# EAGLE board demo (EAGLE 5.11)
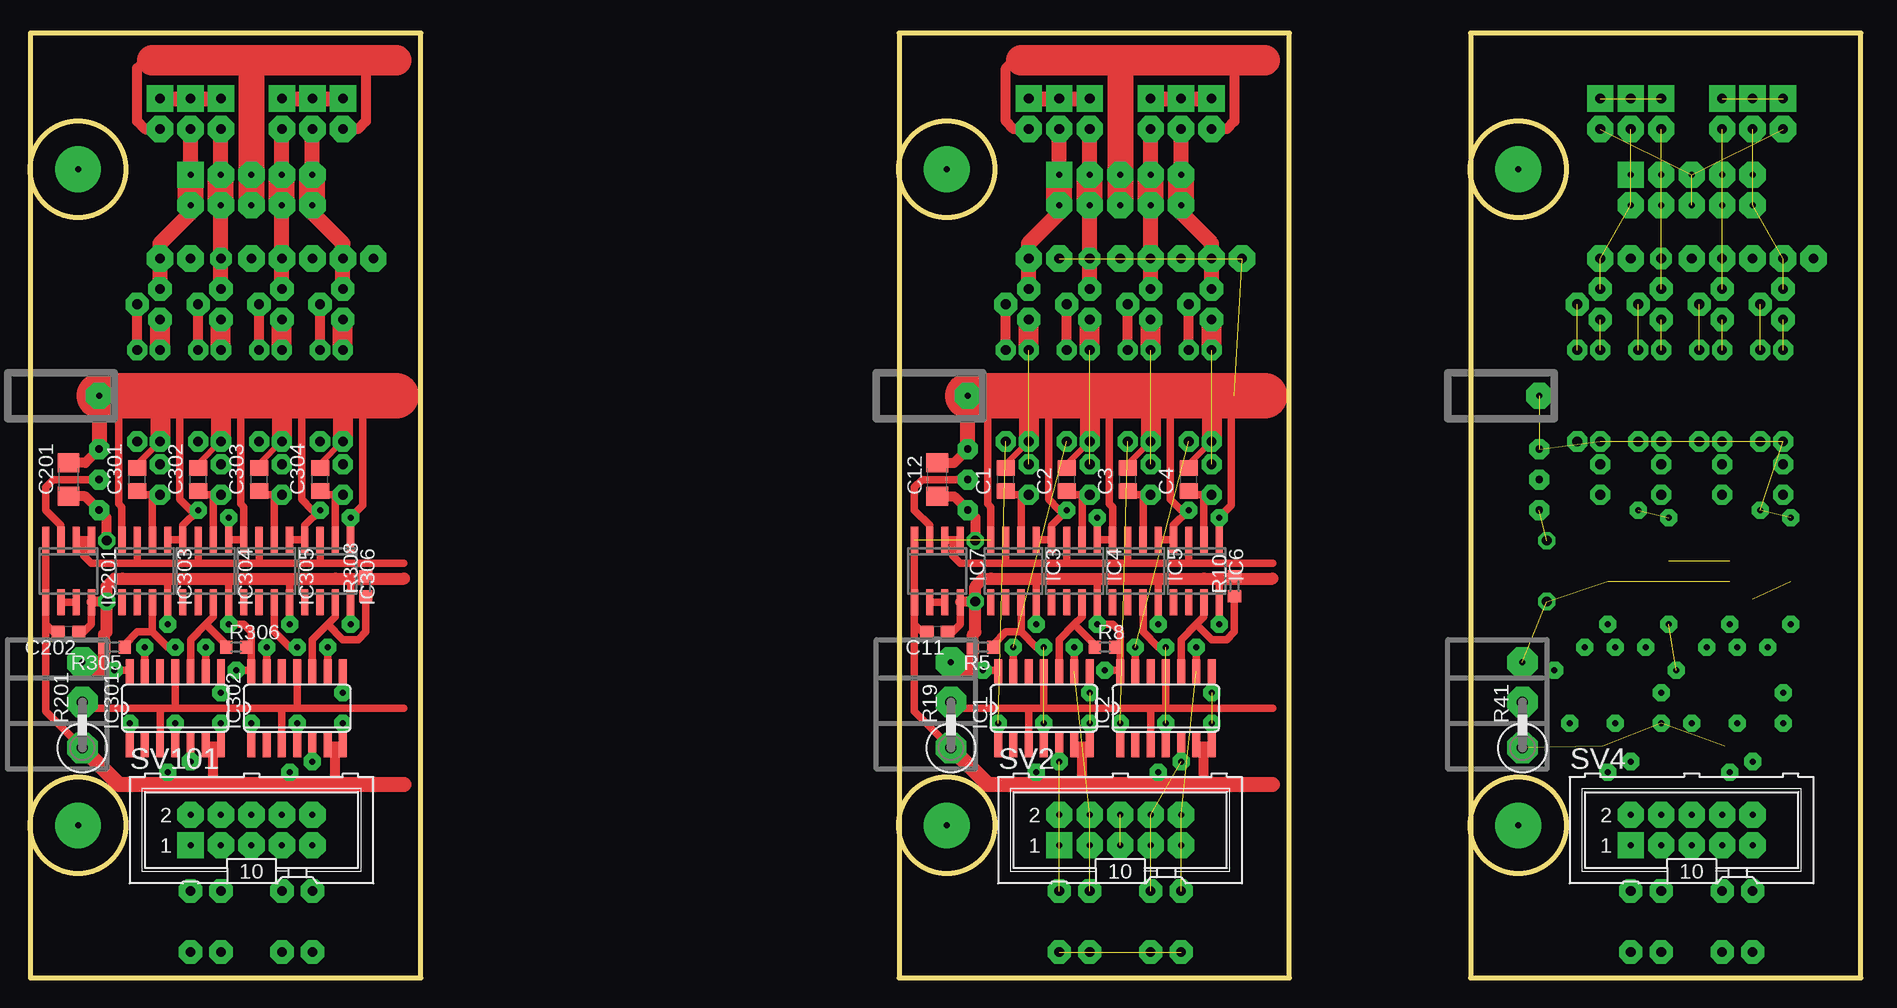
[diagram p0: board, top side]
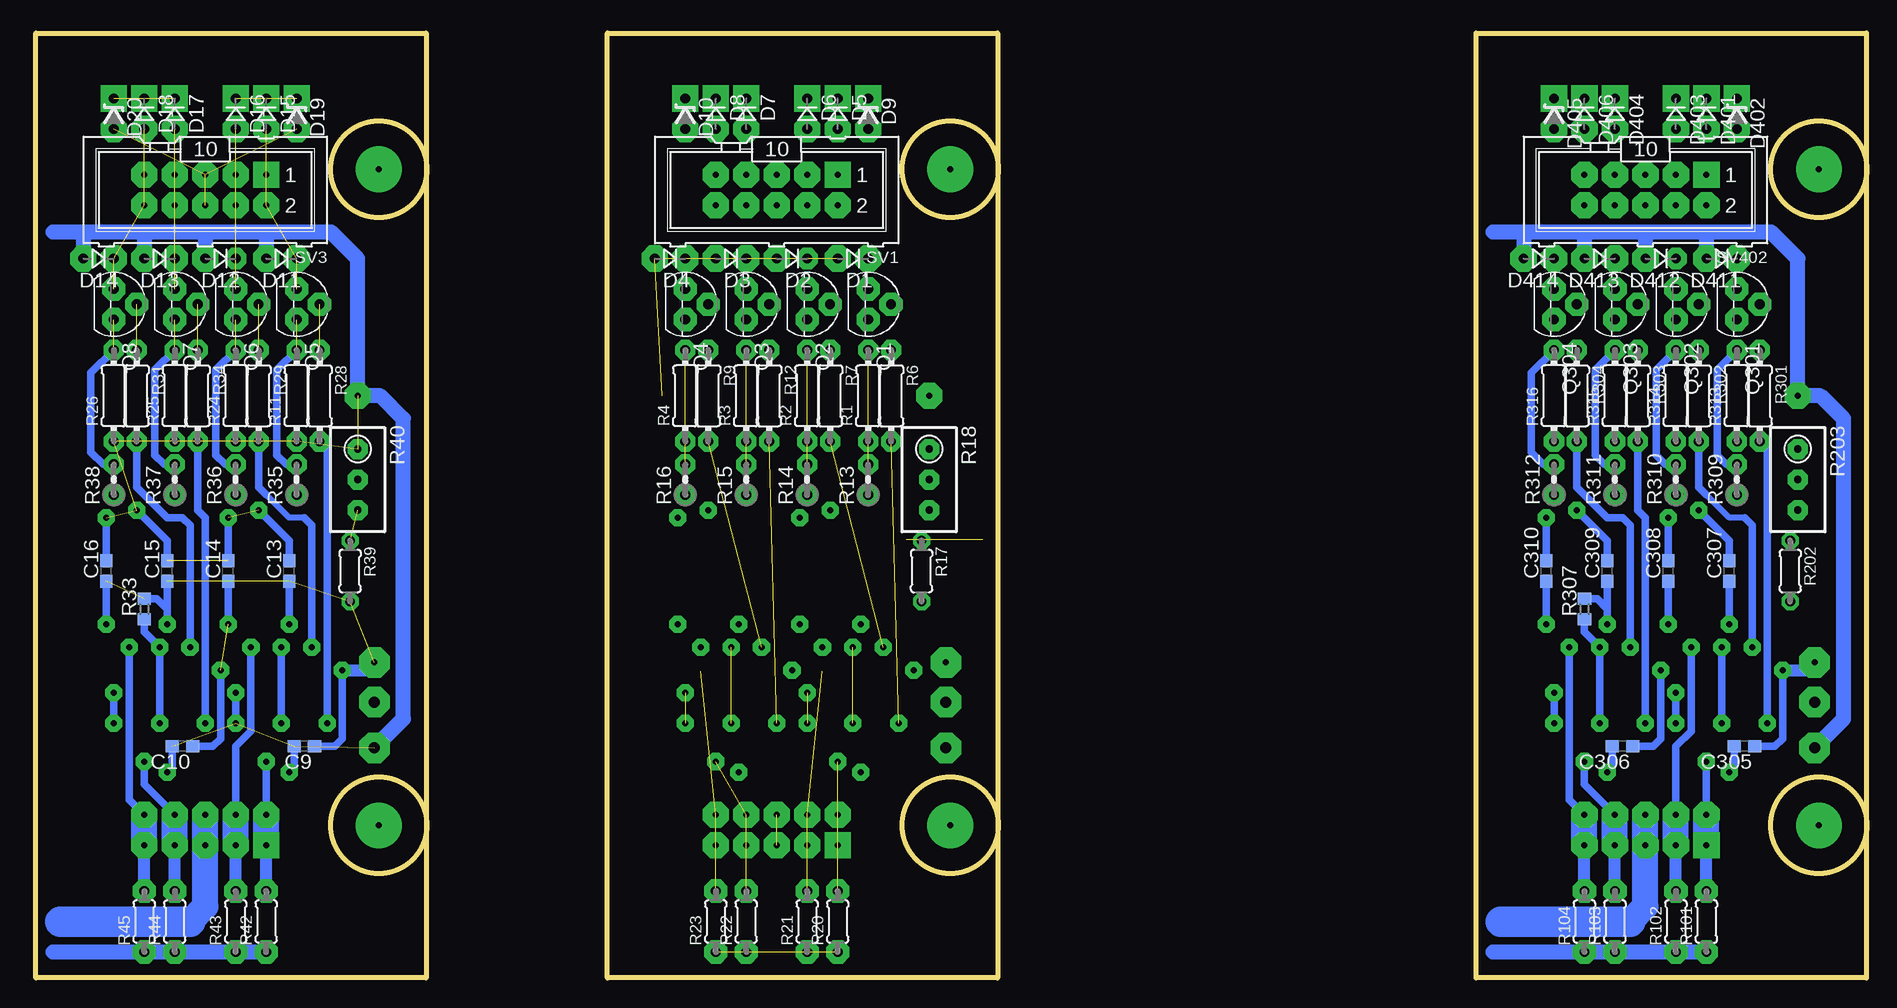
[diagram p1: board, bottom side, seen from below]

Size 152.58 x 78.74 mm. Coordinates in mm from the lower left corner, seen from the top.
Outline: 0.04,0 32.56,0 32.56,78.74 0.04,78.74 0.04,0
Outline: 72.43,0 104.96,0 104.96,78.74 72.43,78.74 72.43,0
Outline: 120.06,0 152.58,0 152.58,78.74 120.06,78.74 120.06,0
Outline: circle at 4,12.71 radius 4
Outline: circle at 4,67.39 radius 4
Outline: circle at 76.39,12.71 radius 4
Outline: circle at 76.39,67.39 radius 4
Outline: circle at 124.02,12.71 radius 4
Outline: circle at 124.02,67.39 radius 4
Copper layers (1*16): Top 0.035mm / dielectric 1.5mm / Bottom 0.035mm
Design rules "default *": minimum track width 10mil, minimum drill 19mil, track to track 8mil, track to pad 8mil, pad to pad 8mil, via to via 8mil, smd to smd 8mil, copper to edge 40mil, drill to drill 8mil, minimum pad ring 10mil, minimum via ring 8mil, stop-mask expansion 4mil, vias tented up to drill 0mil, thermal gap 10mil

## Footprints (pad centres in the part's own frame; a part is rotated, then mirrored left to right if it is on the bottom)
C0805 = smd 1.3 x 1.5: 1 -0.95,0; 2 0.95,0
C0603 = smd 1.1 x 1: 1 -0.85,0; 2 0.85,0
C1206 = smd 1.6 x 1.8: 1 -1.4,0; 2 1.4,0
D-2.5 = drill 0.813 octagon: A 1.27,0; C -1.27,0
ZDIO-2.5 = drill 0.813 octagon: A 1.27,0; C -1.27,0
SO14 = smd 0.66 x 2.032: 1 -3.81,-3.073; 2 -2.54,-3.073; 3 -1.27,-3.073; 4 0,-3.073; 5 1.27,-3.073; 6 2.54,-3.073; 7 3.81,-3.073; 8 3.81,3.073; 9 2.54,3.073; 10 1.27,3.073; 11 0,3.073; 12 -1.27,3.073; 13 -2.54,3.073; 14 -3.81,3.073
SO08 = smd 0.6 x 2.2: 1 -1.905,-2.6; 2 -0.635,-2.6; 3 0.635,-2.6; 4 1.905,-2.6; 5 1.905,2.6; 6 0.635,2.6; 7 -0.635,2.6; 8 -1.905,2.6
TO92 = drill 0.813 octagon: 1 1.27,0; 2 0,1.905; 3 -1.27,0
0204/7 = drill 0.813 octagon: 1 -3.81,0; 2 3.81,0
R0603 = smd 1 x 1.1: 1 -0.85,0; 2 0.85,0
0204V = drill 0.813 octagon: 1 -1.27,0; 2 1.27,0
0204/5 = drill 0.813 octagon: 1 -2.54,0; 2 2.54,0
RTRIM3296W = drill 0.61 round: 1 0,-2.54; 2 0,0; 3 0,2.54
0411V = drill 0.914 octagon: 1 -2.54,0; 2 1.27,0
M10-HOME = drill 0.5 pad 2.184 square: 1 -5.08,-1.27 | drill 0.5 pad 2.184 octagon: 2 -5.08,1.27; 3 -2.54,-1.27; 4 -2.54,1.27; 5 0,-1.27; 6 0,1.27; 7 2.54,-1.27; 8 2.54,1.27; 9 5.08,-1.27; 10 5.08,1.27

## Placement (x,y rotation side)
C1  100nF  [C0805]  81.32,41.53 90 top
C2  100nF  [C0805]  86.4,41.53 90 top
C3  100nF  [C0805]  91.48,41.53 90 top
C4  100nF  [C0805]  96.56,41.53 90 top
C9  100nF  [C0603]  130.22,19.3 180 bottom
C10  100nF  [C0603]  140.38,19.3 180 bottom
C11  100nF  [C0603]  75.61,28.83 180 top
C12  100nF  [C1206]  75.61,41.53 90 top
C13  100nF  [C0603]  131.48,33.91 90 bottom
C14  100nF  [C0603]  136.56,33.91 90 bottom
C15  100nF  [C0603]  141.64,33.91 90 bottom
C16  100nF  [C0603]  146.72,33.91 90 bottom
C201  100nF  [C1206]  3.21,41.53 90 top
C202  100nF  [C0603]  3.21,28.83 180 top
C301  100nF  [C0805]  8.93,41.53 90 top
C302  100nF  [C0805]  14.01,41.53 90 top
C303  100nF  [C0805]  19.09,41.53 90 top
C304  100nF  [C0805]  24.17,41.53 90 top
C305  100nF  [C0603]  10.2,19.3 180 bottom
C306  100nF  [C0603]  20.36,19.3 180 bottom
C307  100nF  [C0603]  11.47,33.91 90 bottom
C308  100nF  [C0603]  16.55,33.91 90 bottom
C309  100nF  [C0603]  21.63,33.91 90 bottom
C310  100nF  [C0603]  26.71,33.91 90 bottom
D1  [D-2.5]  84.5,59.94 180 bottom
D2  [D-2.5]  89.58,59.94 180 bottom
D3  [D-2.5]  94.66,59.94 180 bottom
D4  [D-2.5]  99.73,59.94 180 bottom
D5  [D-2.5]  85.77,72.01 270 bottom
D6  [D-2.5]  88.31,72.01 270 bottom
D7  [D-2.5]  93.39,72.01 270 bottom
D8  [D-2.5]  95.93,72.01 270 bottom
D9  [ZDIO-2.5]  83.23,72.01 270 bottom
D10  [ZDIO-2.5]  98.47,72.01 270 bottom
D11  [D-2.5]  132.12,59.94 180 bottom
D12  [D-2.5]  137.2,59.94 180 bottom
D13  [D-2.5]  142.28,59.94 180 bottom
D14  [D-2.5]  147.36,59.94 180 bottom
D15  [D-2.5]  133.39,72.01 270 bottom
D16  [D-2.5]  135.93,72.01 270 bottom
D17  [D-2.5]  141.01,72.01 270 bottom
D18  [D-2.5]  143.55,72.01 270 bottom
D19  [ZDIO-2.5]  130.85,72.01 270 bottom
D20  [ZDIO-2.5]  146.09,72.01 270 bottom
D401  [D-2.5]  13.38,72.01 270 bottom
D402  [ZDIO-2.5]  10.84,72.01 270 bottom
D403  [D-2.5]  15.91,72.01 270 bottom
D404  [D-2.5]  20.99,72.01 270 bottom
D405  [ZDIO-2.5]  26.07,72.01 270 bottom
D406  [D-2.5]  23.54,72.01 270 bottom
D411  [D-2.5]  12.11,59.94 180 bottom
D412  [D-2.5]  17.18,59.94 180 bottom
D413  [D-2.5]  22.27,59.94 180 bottom
D414  [D-2.5]  27.34,59.94 180 bottom
IC1  4013D  [SO14]  84.5,22.48 0 top
IC2  4013D  [SO14]  94.66,22.48 0 top
IC3  LM311D  [SO08]  81.96,33.91 180 top
IC4  LM311D  [SO08]  87.04,33.91 180 top
IC5  LM311D  [SO08]  92.12,33.91 180 top
IC6  LM311D  [SO08]  97.2,33.91 180 top
IC7  LM358D  [SO08]  75.61,33.91 180 top
IC201  LM358D  [SO08]  3.21,33.91 180 top
IC301  4013D  [SO14]  12.11,22.48 0 top
IC302  4013D  [SO14]  22.27,22.48 0 top
IC303  LM311D  [SO08]  9.57,33.91 180 top
IC304  LM311D  [SO08]  14.64,33.91 180 top
IC305  LM311D  [SO08]  19.72,33.91 180 top
IC306  LM311D  [SO08]  24.8,33.91 180 top
Q1  BC547  [TO92]  83.23,56.13 270 bottom
Q2  BC547  [TO92]  88.31,56.13 270 bottom
Q3  BC547  [TO92]  93.39,56.13 270 bottom
Q4  BC547  [TO92]  98.47,56.13 270 bottom
Q5  BC547  [TO92]  130.85,56.13 270 bottom
Q6  BC547  [TO92]  135.93,56.13 270 bottom
Q7  BC547  [TO92]  141.01,56.13 270 bottom
Q8  BC547  [TO92]  146.09,56.13 270 bottom
Q301  BC547  [TO92]  10.84,56.13 270 bottom
Q302  BC547  [TO92]  15.91,56.13 270 bottom
Q303  BC547  [TO92]  20.99,56.13 270 bottom
Q304  BC547  [TO92]  26.07,56.13 270 bottom
R1  1R0  [0204/7]  83.23,48.51 90 bottom
R2  1R0  [0204/7]  88.31,48.51 90 bottom
R3  1R0  [0204/7]  93.39,48.51 90 bottom
R4  1R0  [0204/7]  98.47,48.51 90 bottom
R5  1K  [R0603]  79.42,27.56 180 top
R6  1K  [0204/7]  81.32,48.51 270 bottom
R7  1K  [0204/7]  86.4,48.51 270 bottom
R8  1K  [R0603]  89.58,27.56 0 top
R9  1K  [0204/7]  96.56,48.51 270 bottom
R10  1K  [R0603]  100.37,32.64 90 top
R11  1R0  [0204/7]  130.85,48.51 90 bottom
R12  1K  [0204/7]  91.48,48.51 270 bottom
R13  1K  [0204V]  83.23,41.53 90 bottom
R14  1K  [0204V]  88.31,41.53 90 bottom
R15  1K  [0204V]  93.39,41.53 90 bottom
R16  1K  [0204V]  98.47,41.53 90 bottom
R17  2K  [0204/5]  78.78,33.91 270 bottom
R18  2K  [RTRIM3296W]  78.15,41.53 180 bottom
R19  1K  [0411V]  76.75,21.72 90 top
R20  [0204/5]  85.77,4.7 90 bottom
R21  [0204/5]  88.31,4.7 90 bottom
R22  [0204/5]  93.39,4.7 90 bottom
R23  [0204/5]  95.93,4.7 90 bottom
R24  1R0  [0204/7]  135.93,48.51 90 bottom
R25  1R0  [0204/7]  141.01,48.51 90 bottom
R26  1R0  [0204/7]  146.09,48.51 90 bottom
R28  1K  [0204/7]  128.94,48.51 270 bottom
R29  1K  [0204/7]  134.03,48.51 270 bottom
R31  1K  [0204/7]  144.19,48.51 270 bottom
R33  1K  [R0603]  143.55,30.73 90 bottom
R34  1K  [0204/7]  139.1,48.51 270 bottom
R35  1K  [0204V]  130.85,41.53 90 bottom
R36  1K  [0204V]  135.93,41.53 90 bottom
R37  1K  [0204V]  141.01,41.53 90 bottom
R38  1K  [0204V]  146.09,41.53 90 bottom
R39  2K  [0204/5]  126.41,33.91 270 bottom
R40  2K  [RTRIM3296W]  125.77,41.53 180 bottom
R41  1K  [0411V]  124.37,21.72 90 top
R42  [0204/5]  133.39,4.7 90 bottom
R43  [0204/5]  135.93,4.7 90 bottom
R44  [0204/5]  141.01,4.7 90 bottom
R45  [0204/5]  143.55,4.7 90 bottom
R101  [0204/5]  13.38,4.7 90 bottom
R102  [0204/5]  15.91,4.7 90 bottom
R103  [0204/5]  20.99,4.7 90 bottom
R104  [0204/5]  23.54,4.7 90 bottom
R201  1K  [0411V]  4.36,21.72 90 top
R202  2K  [0204/5]  6.39,33.91 270 bottom
R203  2K  [RTRIM3296W]  5.75,41.53 180 bottom
R301  1K  [0204/7]  8.93,48.51 270 bottom
R302  1K  [0204/7]  14.01,48.51 270 bottom
R303  1K  [0204/7]  19.09,48.51 270 bottom
R304  1K  [0204/7]  24.17,48.51 270 bottom
R305  1K  [R0603]  7.03,27.56 180 top
R306  1K  [R0603]  17.18,27.56 0 top
R307  1K  [R0603]  23.54,30.73 90 bottom
R308  1K  [R0603]  27.98,32.64 90 top
R309  1K  [0204V]  10.84,41.53 90 bottom
R310  1K  [0204V]  15.91,41.53 90 bottom
R311  1K  [0204V]  20.99,41.53 90 bottom
R312  1K  [0204V]  26.07,41.53 90 bottom
R313  1R0  [0204/7]  10.84,48.51 90 bottom
R314  1R0  [0204/7]  15.91,48.51 90 bottom
R315  1R0  [0204/7]  20.99,48.51 90 bottom
R316  1R0  [0204/7]  26.07,48.51 90 bottom
SV1  BH10S  [M10-HOME]  90.85,65.66 180 bottom
SV2  BH10S  [M10-HOME]  90.85,12.32 0 top
SV3  BH10S  [M10-HOME]  138.47,65.66 180 bottom
SV4  BH10S  [M10-HOME]  138.47,12.32 0 top
SV101  BH10S  [M10-HOME]  18.45,12.32 0 top
SV402  BH10S  [M10-HOME]  18.45,65.66 180 bottom

## Library data of the parts
C1-C4 C9-C16 C201 C202 C301-C310 R1-R26 R28 R29 R31 R33-R45 R101-R104 R201-R203 R301-R316 = rcl
D1-D20 D401-D406 D411-D414 = diode
IC1 IC2 IC301 IC302 = 40xx
IC3-IC7 IC201 IC303-IC306 = linear
Q1-Q8 Q301-Q304 = transistor-npn
SV1-SV4 SV101 SV402 = con-harting-ml

## Nets
+5V: C202.1 C305.1 C306.1 C307.1 C308.1 C309.1 C310.1 IC201.8 IC301.14 IC302.14 IC303.8 IC304.8 IC305.8 IC306.8 R202.2 R305.2 R306.2 R307.2 R308.2
+5V1: C11.1 IC1.14 IC2.14 IC3.8 IC4.8 IC5.8 IC6.8 IC7.8 R5.2 R8.2 R10.2 R17.2
+5V2: C9.1 C10.1 C13.1 C14.1 C15.1 C16.1 R33.2 R39.2
CMP_REF: IC201.1 IC201.2 IC303.3 IC304.3 IC305.3 IC306.3
CMP_REF1: IC3.3 IC4.3 IC5.3 IC6.3 IC7.1 IC7.2
FB1: Q1.1 R1.2 R13.2
FB2: Q2.1 R2.2 R14.2
FB3: Q3.1 R3.2 R15.2
FB4: Q4.1 R4.2 R16.2
FB5: Q5.1 R11.2 R35.2
FB6: Q6.1 R24.2 R36.2
FB7: Q7.1 R25.2 R37.2
FB8: Q8.1 R26.2 R38.2
FB11: Q301.1 R309.2 R313.2
FB12: Q302.1 R310.2 R314.2
FB13: Q303.1 R311.2 R315.2
FB14: Q304.1 R312.2 R316.2
GND: C201.2 C202.2 C301.2 C302.2 C303.2 C304.2 C305.2 C306.2 C307.2 C308.2 C309.2 C310.2 D411.A D412.A D413.A D414.A IC201.4 IC201.5 IC301.6 IC301.7 IC301.8 IC302.6 IC302.7 IC302.8 IC303.1 IC303.4 IC304.1 IC304.4 IC305.1 IC305.4 IC306.1 IC306.4 R201.1 R203.1 R313.1 R314.1 R315.1 R316.1
GND1: C1.2 C2.2 C3.2 C4.2 C11.2 C12.2 D1.A D2.A D3.A D4.A IC1.6 IC1.7 IC1.8 IC2.6 IC2.7 IC2.8 IC3.1 IC3.4 IC4.1 IC4.4 IC5.1 IC5.4 IC6.1 IC6.4 IC7.4 IC7.5 R1.1 R2.1 R3.1 R4.1 R18.1 R19.1
GND2: C9.2 C10.2 C13.2 C14.2 C15.2 C16.2 D11.A D12.A D13.A D14.A R11.1 R24.1 R25.1 R26.1 R40.1 R41.1
M1: D1.C D5.A Q1.3 SV1.1 SV1.2
M2: D2.C D6.A Q2.3 SV1.3 SV1.4
M3: D3.C D7.A Q3.3 SV1.7 SV1.8
M4: D4.C D8.A Q4.3 SV1.9 SV1.10
M5: D11.C D15.A Q5.3 SV3.1 SV3.2
M6: D12.C D16.A Q6.3 SV3.3 SV3.4
M7: D13.C D17.A Q7.3 SV3.7 SV3.8
M8: D14.C D18.A Q8.3 SV3.9 SV3.10
M11: D401.A D411.C Q301.3 SV402.1 SV402.2
M11_EN: IC301.5 R101.2 SV101.1 SV101.2
M11_EN1: IC1.5 R20.2 SV2.1 SV2.2
M11_EN2: R42.2 SV4.1 SV4.2
M12: D403.A D412.C Q302.3 SV402.3 SV402.4
M12_EN: IC301.9 R102.2 SV101.3 SV101.4
M12_EN1: IC1.9 R21.2 SV2.3 SV2.4
M12_EN2: R43.2 SV4.3 SV4.4
M13: D404.A D413.C Q303.3 SV402.7 SV402.8
M13_EN: IC302.5 R103.2 SV101.7 SV101.8
M13_EN1: IC2.5 R22.2 SV2.7 SV2.8
M13_EN2: R44.2 SV4.7 SV4.8
M14: D406.A D414.C Q304.3 SV402.9 SV402.10
M14_EN: IC302.9 R104.2 SV101.9 SV101.10
M14_EN1: IC2.9 R23.2 SV2.9 SV2.10
M14_EN2: R45.2 SV4.9 SV4.10
N$1: C201.1 R202.1 R203.3
N$2: D401.C D402.C D403.C
N$3: IC201.6 IC201.7
N$4: D404.C D405.C D406.C
N$5: IC301.10 IC304.7 R306.1
N$7: Q301.2 R301.1
N$8: IC301.13 R302.2
N$9: IC301.1 R301.2
N$10: IC301.4 IC303.7 R305.1
N$11: Q302.2 R302.1
N$12: Q304.2 R304.1
N$13: Q303.2 R303.1
N$14: IC302.13 R304.2
N$15: IC302.10 IC306.7 R308.1
N$16: IC302.1 R303.2
N$17: C304.1 IC306.2 R312.1
N$18: IC302.4 IC305.7 R307.1
N$19: C303.1 IC305.2 R311.1
N$20: C302.1 IC304.2 R310.1
N$22: C301.1 IC303.2 R309.1
N$24: Q1.2 R6.1
N$25: IC1.1 R6.2
N$26: IC1.4 IC3.7 R5.1
N$27: IC1.10 IC4.7 R8.1
N$28: IC1.13 R7.2
N$29: Q2.2 R7.1
N$30: Q4.2 R9.1
N$31: IC2.13 R9.2
N$32: IC2.10 IC6.7 R10.1
N$33: Q3.2 R12.1
N$34: IC2.1 R12.2
N$35: IC2.4 IC5.7
N$36: C4.1 IC6.2 R16.1
N$37: C3.1 IC5.2 R15.1
N$38: C2.1 IC4.2 R14.1
N$39: C1.1 IC3.2 R13.1
N$40: C12.1 R17.1 R18.3
N$41: IC7.6 IC7.7
N$42: D5.C D6.C D9.C
N$43: D7.C D8.C D10.C
N$46: Q5.2 R28.1
N$47: R28.2
N$51: R29.2
N$52: Q6.2 R29.1
N$53: Q8.2 R31.1
N$54: R31.2
N$56: Q7.2 R34.1
N$57: R34.2
N$58: R33.1
N$59: R38.1
N$60: R37.1
N$61: R36.1
N$62: R35.1
N$63: R39.1 R40.3
N$65: D15.C D16.C D19.C
N$66: D17.C D18.C D20.C
S$1: D9.A D10.A SV1.5 SV1.6
S$2: D402.A D405.A SV402.5 SV402.6
S$3: R20.1 R21.1 R22.1 R23.1
S$4: D19.A D20.A SV3.5 SV3.6
S$5: R42.1 R43.1 R44.1 R45.1
S$24: R101.1 R102.1 R103.1 R104.1
TR_CLK: IC301.3 IC301.11 IC302.3 IC302.11 R201.2
TR_CLK1: IC1.3 IC1.11 IC2.3 IC2.11 R19.2
TR_CLK2: R41.2
VCC: SV101.5 SV101.6
VCC1: SV2.5 SV2.6
VCC2: SV4.5 SV4.6
~0.5V: IC201.3 R203.2
~0.5V1: IC7.3 R18.2
~0.5V2: R40.2

## Tracks (layer width: path | path; a pad name or v marks a point on that pad's centre or on a via)
+5V  (via drill 0.5 pad 1.42, 0.5 pad 2.54)
  Top 0.61: 11.47,33.27 16.55,33.27 | 21.63,33.27 16.55,33.27 | 25.44,33.27 21.63,33.27 | 21.63,33.27 IC305.8 v21.63,29.46 | 18.45,27.56 IC302.14 18.35,25.65 v17.18,25.65 | 18.45,27.56 18.45,28.83 17.82,29.46 v16.55,29.46 IC304.8 16.55,33.27 | 11.47,33.27 IC303.8 v11.47,29.46 | v26.71,29.46 IC306.8 C310.1 26.71,33.27 27.56,33.49 R308.2 | 18.45,27.56 R306.2 | v7.03,25.65 8.19,25.65 IC301.14 | C202.1 4.49,28.83 5.12,29.46 IC201.8 | 7.71,33.27 11.47,33.27
  Top 0.813: v6.39,31.37 5.18,31.37 IC201.8
  Top 1.016: 31.15,33.27 26.71,33.27 25.44,33.27 7.71,33.27 7.03,33.27 6.39,32.64 v6.39,31.37 6.39,28.83 6.17,28.61 R305.2 6.17,25.87 6.39,25.65 | v7.03,25.65 6.39,25.65 | 6.39,25.65 4.99,25.65 v4.36,26.29
  Bottom 0.61: v11.47,29.46 C307.1 | v16.55,29.46 C308.1 | C309.1 v21.63,29.46 21.63,30.73 22.48,31.58 R307.2 | v26.71,29.46 C310.1 | C306.1 17.82,19.3 17.18,19.94 v17.18,25.65 | C305.1 7.66,19.3 7.03,19.94 v7.03,25.65
  Bottom 1.016: v7.03,25.65 4.99,25.65 v4.36,26.29
+5V1  (via drill 0.5 pad 1.42, 0.5 pad 2.54)
  Top 0.61: 83.86,33.27 88.94,33.27 | 94.02,33.27 88.94,33.27 | 97.83,33.27 94.02,33.27 | 94.02,33.27 IC5.8 v94.02,29.46 | 90.85,27.56 IC2.14 90.74,25.65 v89.58,25.65 | 90.85,27.56 90.85,28.83 90.21,29.46 v88.94,29.46 IC4.8 88.94,33.27 | 83.86,33.27 IC3.8 v83.86,29.46 | v99.1,29.46 IC6.8 99.1,33.06 99.1,33.27 99.95,33.49 R10.2 | 90.85,27.56 R8.2 | v79.42,25.65 80.58,25.65 IC1.14 | C11.1 76.88,28.83 77.51,29.46 IC7.8 | 80.1,33.27 83.86,33.27
  Top 0.813: v78.78,31.37 77.57,31.37 IC7.8
  Top 1.016: 103.55,33.27 99.1,33.27 97.83,33.27 80.1,33.27 79.42,33.27 78.78,32.64 v78.78,31.37 78.78,28.83 78.57,28.61 R5.2 78.57,25.87 78.78,25.65 | v79.42,25.65 78.78,25.65 | 78.78,25.65 77.38,25.65 v76.75,26.29
+5V2  (via drill 0.5 pad 1.42, 0.5 pad 2.54)  (6 unrouted)
  Bottom 0.61: v131.48,29.46 C13.1 | v136.56,29.46 C14.1 | C15.1 v141.64,29.46 141.64,30.73 142.5,31.58 R33.2 | v146.72,29.46 C16.1 | C10.1 137.83,19.3 137.2,19.94 v137.2,25.65 | C9.1 127.68,19.3 127.04,19.94 v127.04,25.65
  Bottom 1.016: v127.04,25.65 125.01,25.65 v124.37,26.29
  other vias: 126.41,31.37
CMP_REF
  Top 0.61: 8.93,34.54 IC303.3 | 8.93,34.54 14.01,34.54 | 14.01,34.54 19.09,34.54 | 19.09,34.54 24.17,34.54 | 24.17,34.54 31.15,34.54 | 24.17,34.54 IC306.3 | 19.09,34.54 IC305.3 | 14.01,34.54 IC304.3 | IC201.2 IC201.1 4.49,36.45 4.49,35.18 5.12,34.54 8.93,34.54
CMP_REF1
  Top 0.61: 81.32,34.54 IC3.3 | 81.32,34.54 86.4,34.54 | 86.4,34.54 91.48,34.54 | 91.48,34.54 96.56,34.54 | 96.56,34.54 103.55,34.54 | 96.56,34.54 IC6.3 | 91.48,34.54 IC5.3 | 86.4,34.54 IC4.3 | IC7.2 IC7.1 76.88,36.45 76.88,35.18 77.51,34.54 81.32,34.54
FB1  (via drill 0.5 pad 1.68, 0.5 pad 1.93)  (1 unrouted)
  Top 1.676: R1.2 Q1.1
  other vias: 83.23,54.86 83.23,52.32 83.23,42.8
FB2  (via drill 0.5 pad 1.68, 0.5 pad 1.93)  (1 unrouted)
  Top 1.676: R2.2 Q2.1
  other vias: 88.31,54.86 88.31,52.32 88.31,42.8
FB3  (via drill 0.5 pad 1.68, 0.5 pad 1.93)  (1 unrouted)
  Top 1.676: R3.2 Q3.1
  other vias: 93.39,54.86 93.39,52.32 93.39,42.8
FB4  (via drill 0.5 pad 1.68, 0.5 pad 1.93)  (1 unrouted)
  Top 1.676: R4.2 Q4.1
  other vias: 98.47,54.86 98.47,52.32 98.47,42.8
FB5  (via drill 0.5 pad 1.68, 0.5 pad 1.93)  (1 unrouted)
  Bottom 0.61: R11.2 132.5,50.67 132.5,43.56 131.74,42.8 R35.2
  other vias: 130.85,54.86 130.85,52.32 130.85,42.8
FB6  (via drill 0.5 pad 1.68, 0.5 pad 1.93)  (1 unrouted)
  Bottom 0.61: R24.2 137.58,50.67 137.58,43.56 136.82,42.8 R36.2
  other vias: 135.93,54.86 135.93,52.32 135.93,42.8
FB7  (via drill 0.5 pad 1.68, 0.5 pad 1.93)  (1 unrouted)
  Bottom 0.61: R25.2 142.66,50.67 142.66,43.56 141.9,42.8 R37.2
  other vias: 141.01,54.86 141.01,52.32 141.01,42.8
FB8  (via drill 0.5 pad 1.68, 0.5 pad 1.93)  (1 unrouted)
  Bottom 0.61: R26.2 148,50.42 148,43.81 146.98,42.8 R38.2
  other vias: 146.09,54.86 146.09,52.32 146.09,42.8
FB11  (via drill 0.5 pad 1.68, 0.5 pad 1.93)
  Top 1.676: R313.2 Q301.1
  Bottom 0.61: R313.2 12.49,50.67 12.49,43.56 11.72,42.8 R309.2
  other vias: 10.84,54.86 10.84,52.32 10.84,42.8
FB12  (via drill 0.5 pad 1.68, 0.5 pad 1.93)
  Top 1.676: R314.2 Q302.1
  Bottom 0.61: R314.2 17.57,50.67 17.57,43.56 16.8,42.8 R310.2
  other vias: 15.91,54.86 15.91,52.32 15.91,42.8
FB13  (via drill 0.5 pad 1.68, 0.5 pad 1.93)
  Top 1.676: R315.2 Q303.1
  Bottom 0.61: R315.2 22.65,50.67 22.65,43.56 21.88,42.8 R311.2
  other vias: 20.99,54.86 20.99,52.32 20.99,42.8
FB14  (via drill 0.5 pad 1.68, 0.5 pad 1.93)
  Top 1.676: R316.2 Q304.1
  Bottom 0.61: R316.2 27.98,50.42 27.98,43.81 26.96,42.8 R312.2
  other vias: 26.07,54.86 26.07,52.32 26.07,42.8
GND  (via drill 0.5 pad 1.42, 0.5 pad 1.68, 0.5 pad 2.18, 0.5 pad 2.54)
  Top 0.508: R316.1 24.17,42.8 | R315.1 19.09,42.8 | R314.1 14.01,42.8 | R313.1 8.93,42.8
  Top 0.61: IC305.1 IC306.4 22.9,37.72 v24.17,38.99 23.54,38.99 22.65,39.88 22.65,47.88 22.9,48.13 22.9,48.51 | v16.55,38.35 IC304.1 IC305.4 17.82,39.24 17.57,39.5 17.57,48.39 17.69,48.51 | v26.71,38.35 IC306.1 | v26.71,38.35 26.71,36.45 | 11.53,36.51 IC303.1 IC304.4 12.74,37.72 v14.01,38.99 13.38,38.99 12.49,39.88 12.49,48.51 | 26.07,25.65 IC302.8 v26.07,23.75 | v26.71,38.35 27.73,39.37 27.73,48.51 | 24.17,42.8 C304.2 | 14.01,42.8 C302.2 | 19.09,42.8 C303.2 | v15.91,23.75 IC301.8 | IC303.4 7.66,39.24 7.41,39.5 7.41,48.39 7.53,48.51 | 26.07,48.51 26.71,47.24 | IC302.7 IC302.6 | IC302.7 v26.07,21.21 | v15.91,21.21 IC301.7 IC301.6 15.18,19.41 15.28,19.3 | IC302.7 25.54,19.41 25.44,19.3 | 8.93,42.8 C301.2 | IC201.4 IC201.5 1.31,29.46 | C202.2 1.95,28.83 1.31,29.46 | 1.31,29.46 1.31,22.23 R201.1
  Top 0.813: 27.98,48.51 27.98,47.88 | C201.2 4.62,42.93 R203.1 | 25.44,16.13 25.44,19.3 | 15.28,16.13 15.28,19.3
  Top 1.27: 31.15,16.13 25.44,16.13 21.63,16.13 | v5.75,48.51 R203.1 | 21.63,16.13 v21.63,17.14 | 21.63,16.13 15.28,16.13 11.47,16.13 | 11.47,16.13 v11.47,17.14 | 11.47,16.13 7.41,16.13 R201.1
  Top 1.676: 26.07,48.51 R316.1 | 20.99,48.51 R315.1 | 15.91,48.51 R314.1 | 10.84,48.51 R313.1
  Top 2.54: 27.73,48.51 27.98,48.51
  Top 3.81: 27.98,48.51 30.52,48.51 | 27.73,48.51 26.07,48.51 22.9,48.51 20.99,48.51 17.69,48.51 15.91,48.51 12.49,48.51 10.84,48.51 7.53,48.51 v5.75,48.51
  Bottom 0.61: C309.2 21.63,36.45 v24.17,38.99 | v16.55,38.35 C308.2 | v26.71,38.35 C310.2 | C307.2 11.47,36.45 v14.01,38.99 | v26.07,21.21 v26.07,23.75 | v15.91,21.21 v15.91,23.75 | C306.2 21.21,17.57 v21.63,17.14 | C305.2 11.05,17.57 v11.47,17.14
  Bottom 1.27: 28.61,62.16 31.15,62.16 | 28.61,62.16 D414.A | 23.54,62.16 28.61,62.16 | 23.54,62.16 D413.A | 18.45,62.16 23.54,62.16 | 18.45,62.16 D412.A | 13.38,62.16 18.45,62.16 | 13.38,62.16 v13.38,59.94 | 13.38,62.16 7.97,62.16 5.75,59.94 v5.75,48.51 3.85,48.51 1.95,46.61 1.95,21.59 R201.1
  other vias: 28.61,59.94 26.07,44.7 23.54,59.94 18.45,59.94 20.99,44.7 15.91,44.7 10.84,44.7 5.75,44.07 4.36,19.18
GND1  (via drill 0.5 pad 1.42, 0.5 pad 1.68, 0.5 pad 2.18, 0.5 pad 2.54)  (7 unrouted)
  Top 0.508: R4.1 96.56,42.8 | R3.1 91.48,42.8 | R2.1 86.4,42.8 | R1.1 81.32,42.8
  Top 0.61: IC5.1 IC6.4 95.29,37.72 v96.56,38.99 95.93,38.99 95.04,39.88 95.04,47.88 95.29,48.13 95.29,48.51 | v88.94,38.35 IC4.1 IC5.4 90.21,39.24 89.96,39.5 89.96,48.39 90.08,48.51 | v99.1,38.35 IC6.1 | v99.1,38.35 99.1,36.45 | 83.92,36.51 IC3.1 IC4.4 85.13,37.72 v86.4,38.99 85.77,38.99 84.88,39.88 84.88,48.51 | 98.47,25.65 IC2.8 v98.47,23.75 | v99.1,38.35 100.12,39.37 100.12,48.51 | 96.56,42.8 C4.2 | 86.4,42.8 C2.2 | 91.48,42.8 C3.2 | IC1.8 v88.31,23.75 | IC3.4 80.05,39.24 79.8,39.5 79.8,48.39 79.92,48.51 | 98.47,48.51 99.1,47.24 | IC2.7 IC2.6 | IC2.7 v98.47,21.21 | v88.31,21.21 IC1.7 IC1.6 87.57,19.41 87.67,19.3 | IC2.7 97.93,19.41 97.83,19.3 | 81.32,42.8 C1.2 | IC7.4 IC7.5 73.7,29.46 | C11.2 74.34,28.83 73.7,29.46 | 73.7,29.46 73.7,22.23 R19.1
  Top 0.813: 100.37,48.51 100.37,47.88 | C12.2 77.01,42.93 R18.1 | 97.83,16.13 97.83,19.3 | 87.67,16.13 87.67,19.3
  Top 1.27: 103.55,16.13 97.83,16.13 94.02,16.13 | R18.1 v78.15,48.51 | 94.02,16.13 v94.02,17.14 | 94.02,16.13 87.67,16.13 83.86,16.13 | 83.86,16.13 v83.86,17.14 | 83.86,16.13 79.8,16.13 R19.1
  Top 1.676: 98.47,48.51 R4.1 | 93.39,48.51 R3.1 | 88.31,48.51 R2.1 | 83.23,48.51 R1.1
  Top 2.54: 100.12,48.51 100.37,48.51
  Top 3.81: 100.37,48.51 102.91,48.51 | 100.12,48.51 98.47,48.51 95.29,48.51 93.39,48.51 90.08,48.51 88.31,48.51 84.88,48.51 83.23,48.51 79.92,48.51 v78.15,48.51
  other vias: 101.01,59.94 98.47,44.7 95.93,59.94 90.85,59.94 93.39,44.7 88.31,44.7 85.77,59.94 83.23,44.7 78.15,44.07 76.75,19.18
GND2  (via drill 0.5 pad 1.42, 0.5 pad 1.68, 0.5 pad 2.18, 0.5 pad 2.54)  (12 unrouted)
  Bottom 0.61: C16.2 v146.72,38.35 | C15.2 141.64,36.45 v144.19,38.99 | C14.2 v136.56,38.35 | C13.2 131.48,36.45 v134.03,38.99 | v141.64,17.14 141.22,17.57 C10.2 | v135.93,21.21 v135.93,23.75 | v131.48,17.14 131.06,17.57 C9.2
  Bottom 1.27: 148.63,62.16 151.17,62.16 | 148.63,62.16 D14.A | 143.55,62.16 148.63,62.16 | 143.55,62.16 D13.A | 138.47,62.16 143.55,62.16 | 138.47,62.16 D12.A | 133.39,62.16 138.47,62.16 | 133.39,62.16 D11.A | 133.39,62.16 127.99,62.16 125.77,59.94 v125.77,48.51 123.87,48.51 121.96,46.61 121.96,21.59 R41.1
  other vias: 146.09,44.7 148.63,59.94 143.55,59.94 141.01,44.7 138.47,59.94 133.39,59.94 135.93,44.7 130.85,44.7 125.77,44.07 124.37,19.18
M1  (via drill 0.5 pad 1.93, 0.5 pad 2.18)
  Top 1.27: SV1.2 85.77,63.75 83.23,61.21 D1.C Q1.3 | SV1.1 D5.A
  Top 2.184: SV1.2 SV1.1
  other vias: 83.23,57.4 83.23,59.94 85.77,70.74
M2  (via drill 0.5 pad 1.78, 0.5 pad 1.93, 0.5 pad 2.18)
  Top 1.27: Q2.3 D2.C SV1.4 | SV1.3 D6.A
  Top 2.184: SV1.4 SV1.3
  other vias: 88.31,57.4 88.31,59.94 88.31,70.74
M3  (via drill 0.5 pad 1.93, 0.5 pad 2.18)
  Top 1.27: Q3.3 D3.C SV1.8 | SV1.7 D7.A
  Top 2.184: SV1.8 SV1.7
  other vias: 93.39,57.4 93.39,59.94 93.39,70.74
M4  (via drill 0.5 pad 1.93, 0.5 pad 2.18)
  Top 1.27: SV1.10 95.93,63.75 98.47,61.21 D4.C Q4.3 | SV1.9 D8.A
  Top 2.184: SV1.10 SV1.9
  other vias: 98.47,57.4 98.47,59.94 95.93,70.74
M5  (via drill 0.5 pad 1.93, 0.5 pad 2.18)  (4 unrouted)
  other vias: 130.85,57.4 130.85,59.94 133.39,70.74
M6  (via drill 0.5 pad 1.78, 0.5 pad 1.93, 0.5 pad 2.18)  (4 unrouted)
  other vias: 135.93,57.4 135.93,59.94 135.93,70.74
M7  (via drill 0.5 pad 1.93, 0.5 pad 2.18)  (4 unrouted)
  other vias: 141.01,57.4 141.01,59.94 141.01,70.74
M8  (via drill 0.5 pad 1.93, 0.5 pad 2.18)  (4 unrouted)
  other vias: 146.09,57.4 146.09,59.94 143.55,70.74
M11  (via drill 0.5 pad 1.93, 0.5 pad 2.18)
  Top 1.27: SV402.2 13.38,63.75 10.84,61.21 D411.C Q301.3 | SV402.1 D401.A
  Top 2.184: SV402.2 SV402.1
  other vias: 10.84,57.4 10.84,59.94 13.38,70.74
M11_EN  (via drill 0.5 pad 1.42, 0.5 pad 1.93)
  Top 0.61: v13.38,18.03 IC301.5
  Bottom 0.61: SV101.2 v13.38,18.03
  Bottom 1.016: R101.2 SV101.1
  Bottom 2.184: SV101.1 SV101.2
  other vias: 13.38,7.24
M11_EN1  (via drill 0.5 pad 1.42, 0.5 pad 1.93)  (3 unrouted)
  Top 0.61: IC1.5 v85.77,18.03
  other vias: 85.77,7.24
M11_EN2  (via drill 0.5 pad 1.42, 0.5 pad 1.93)
  Bottom 0.61: SV4.2 v133.39,18.03
  Bottom 1.016: R42.2 SV4.1
  Bottom 2.184: SV4.1 SV4.2
  other vias: 133.39,7.24
M12  (via drill 0.5 pad 1.78, 0.5 pad 1.93, 0.5 pad 2.18)
  Top 1.27: Q302.3 D412.C SV402.4 | SV402.3 D403.A
  Top 2.184: SV402.4 SV402.3
  other vias: 15.91,57.4 15.91,59.94 15.91,70.74
M12_EN  (via drill 0.5 pad 1.42, 0.5 pad 1.93)
  Top 0.61: v14.64,27.56 IC301.9
  Bottom 0.61: SV101.4 15.91,19.3 14.64,20.57 v14.64,27.56
  Bottom 1.016: R102.2 SV101.3
  Bottom 2.184: SV101.3 SV101.4
  other vias: 15.91,7.24
M12_EN1  (via drill 0.5 pad 1.42, 0.5 pad 1.93)  (3 unrouted)
  Top 0.61: IC1.9 v87.04,27.56
  other vias: 88.31,7.24
M12_EN2  (via drill 0.5 pad 1.42, 0.5 pad 1.93)
  Bottom 0.61: SV4.4 135.93,19.3 134.66,20.57 v134.66,27.56
  Bottom 1.016: R43.2 SV4.3
  Bottom 2.184: SV4.3 SV4.4
  other vias: 135.93,7.24
M13  (via drill 0.5 pad 1.93, 0.5 pad 2.18)
  Top 1.27: Q303.3 v20.99,59.94 SV402.8 | SV402.7 D404.A
  Top 2.184: SV402.8 SV402.7
  other vias: 20.99,57.4 20.99,70.74
M13_EN  (via drill 0.5 pad 1.42, 0.5 pad 1.93)
  Top 0.61: v23.54,18.03 IC302.5
  Bottom 0.61: SV101.8 23.54,16.13 v23.54,18.03
  Bottom 1.016: R103.2 SV101.7
  Bottom 2.184: SV101.7 SV101.8
  other vias: 20.99,7.24
M13_EN1  (via drill 0.5 pad 1.42, 0.5 pad 1.93)  (3 unrouted)
  Top 0.61: IC2.5 v95.93,18.03
  other vias: 93.39,7.24
M13_EN2  (via drill 0.5 pad 1.42, 0.5 pad 1.93)
  Bottom 0.61: SV4.8 143.55,16.13 v143.55,18.03
  Bottom 1.016: R44.2 SV4.7
  Bottom 2.184: SV4.7 SV4.8
  other vias: 141.01,7.24
M14  (via drill 0.5 pad 1.93, 0.5 pad 2.18)
  Top 1.27: SV402.10 23.54,63.75 26.07,61.21 D414.C Q304.3 | SV402.9 D406.A
  Top 2.184: SV402.10 SV402.9
  other vias: 26.07,57.4 26.07,59.94 23.54,70.74
M14_EN  (via drill 0.5 pad 1.42, 0.5 pad 1.93)
  Top 0.61: v24.8,27.56 IC302.9
  Bottom 0.61: SV101.10 24.8,14.86 v24.8,27.56
  Bottom 1.016: R104.2 SV101.9
  Bottom 2.184: SV101.9 SV101.10
  other vias: 23.54,7.24
M14_EN1  (via drill 0.5 pad 1.42, 0.5 pad 1.93)  (3 unrouted)
  Top 0.61: IC2.9 v97.2,27.56
  other vias: 95.93,7.24
M14_EN2  (via drill 0.5 pad 1.42, 0.5 pad 1.93)
  Bottom 0.61: SV4.10 144.82,14.86 v144.82,27.56
  Bottom 1.016: R45.2 SV4.9
  Bottom 2.184: SV4.9 SV4.10
  other vias: 143.55,7.24
N$1  (via drill 0.5 pad 1.42, 0.5 pad 1.68)
  Top 0.813: C201.1 4.62,40.13 R203.3 6.39,38.35 R202.1
  other vias: 5.75,38.99 6.39,36.45
N$2  (via drill 0.5 pad 2.18)
  Top 1.27: v15.91,73.28 v13.38,73.28 v10.84,73.28
N$3
  Top 0.61: IC201.7 IC201.6
N$4  (via drill 0.5 pad 2.18)
  Top 1.27: v20.99,73.28 v23.54,73.28 v26.07,73.28
N$5
  Top 0.61: IC301.10 13.38,28.19 14.64,29.46 | 14.64,29.46 15.28,30.1 IC304.7 | R306.1 16.34,27.77 14.64,29.46
N$6  (via drill 0.5 pad 3.81)
  other vias: 76.39,67.39
N$7  (via drill 0.5 pad 1.68, 0.5 pad 1.93)
  Top 0.813: R301.1 Q301.2
  other vias: 8.93,52.32 8.93,56.13
N$8  (via drill 0.5 pad 1.42, 0.5 pad 1.68)
  Top 0.61: IC301.13 v9.57,27.56
  Bottom 0.508: 10.2,38.35 11.47,38.35 13.38,40.26
  Bottom 0.61: v9.57,27.56 9.57,37.72 10.2,38.35 | 13.38,40.26 14.01,40.89 R302.2
  other vias: 14.01,44.7
N$9  (via drill 0.5 pad 1.42, 0.5 pad 1.68)
  Top 0.61: IC301.1 v8.3,21.21
  Bottom 0.61: v8.3,21.21 8.3,44.07 R301.2
  other vias: 8.93,44.7
N$10  (via drill 0.5 pad 1.42)
  Top 0.61: 10.2,28.83 IC303.7 | v12.11,27.56 11.47,27.56 10.2,28.83 | IC301.4 v12.11,21.21 | R305.1 7.88,27.77 8.93,28.83 10.2,28.83
  Bottom 0.61: v12.11,21.21 v12.11,27.56
N$11  (via drill 0.5 pad 1.68, 0.5 pad 1.93)
  Top 0.813: R302.1 Q302.2
  other vias: 14.01,56.13 14.01,52.32
N$12  (via drill 0.5 pad 1.68, 0.5 pad 1.93)
  Top 0.813: R304.1 Q304.2
  other vias: 24.17,56.13 24.17,52.32
N$13  (via drill 0.5 pad 1.68, 0.5 pad 1.93)
  Top 0.813: R303.1 Q303.2
  other vias: 19.09,56.13 19.09,52.32
N$14  (via drill 0.5 pad 1.42, 0.5 pad 1.68)
  Top 0.61: IC302.13 v19.72,27.56
  Bottom 0.61: v19.72,27.56 19.72,37.72 20.36,38.35 21.63,38.35 24.17,40.89 R304.2
  other vias: 24.17,44.7
N$15
  Top 0.61: IC302.10 23.54,28.19 24.8,29.46 | 24.8,29.46 25.44,30.1 IC306.7 | R308.1 27.98,28.83 27.34,28.19 26.07,28.19 24.8,29.46
N$16  (via drill 0.5 pad 1.42, 0.5 pad 1.68)
  Top 0.61: IC302.1 v18.45,21.21
  Bottom 0.61: v18.45,21.21 18.45,38.35 19.09,38.99 R303.2
  other vias: 19.09,44.7
N$17  (via drill 0.5 pad 1.68)
  Top 0.61: 25.44,40.26 24.49,40.26 C304.1 | 25.44,40.26 IC306.2 | 25.44,40.26 v26.07,40.26
N$18  (via drill 0.5 pad 1.42)
  Top 0.61: v22.27,27.56 21.63,27.56 20.36,28.83 IC305.7 | IC302.4 v22.27,21.21
  Bottom 0.61: v22.27,21.21 v22.27,27.56 23.54,28.83 R307.1
N$19  (via drill 0.5 pad 1.68)
  Top 0.61: 20.36,40.26 19.41,40.26 C303.1 | 20.36,40.26 IC305.2 | 20.36,40.26 v20.99,40.26
N$20  (via drill 0.5 pad 1.68)
  Top 0.61: 15.28,40.26 14.33,40.26 C302.1 | 15.28,40.26 IC304.2 | 15.28,40.26 v15.91,40.26
N$21  (via drill 0.5 pad 3.81)
  other vias: 4,67.39
N$22  (via drill 0.5 pad 1.68)
  Top 0.61: 10.2,40.26 9.25,40.26 C301.1 | 10.2,40.26 IC303.2 | 10.2,40.26 v10.84,40.26
N$23  (via drill 0.5 pad 3.81)
  other vias: 76.39,12.71
N$24  (via drill 0.5 pad 1.68, 0.5 pad 1.93)
  Top 0.813: R6.1 Q1.2
  other vias: 81.32,52.32 81.32,56.13
N$25  (via drill 0.5 pad 1.42, 0.5 pad 1.68)  (1 unrouted)
  Top 0.61: IC1.1 v80.69,21.21
  other vias: 81.32,44.7
N$26  (via drill 0.5 pad 1.42)  (1 unrouted)
  Top 0.61: 82.59,28.83 IC3.7 | v84.5,27.56 83.86,27.56 82.59,28.83 | IC1.4 v84.5,21.21 | R5.1 80.27,27.77 81.32,28.83 82.59,28.83
N$27
  Top 0.61: IC1.10 85.77,28.19 87.04,29.46 | 87.04,29.46 87.67,30.1 IC4.7 | R8.1 88.73,27.77 87.04,29.46
N$28  (via drill 0.5 pad 1.42, 0.5 pad 1.68)  (1 unrouted)
  Top 0.61: IC1.13 v81.96,27.56
  other vias: 86.4,44.7
N$29  (via drill 0.5 pad 1.68, 0.5 pad 1.93)
  Top 0.813: R7.1 Q2.2
  other vias: 86.4,56.13 86.4,52.32
N$30  (via drill 0.5 pad 1.68, 0.5 pad 1.93)
  Top 0.813: R9.1 Q4.2
  other vias: 96.56,56.13 96.56,52.32
N$31  (via drill 0.5 pad 1.42, 0.5 pad 1.68)  (1 unrouted)
  Top 0.61: IC2.13 v92.12,27.56
  other vias: 96.56,44.7
N$32
  Top 0.61: IC2.10 95.93,28.19 97.2,29.46 | 97.2,29.46 97.83,30.1 IC6.7 | R10.1 100.37,28.83 99.73,28.19 98.47,28.19 97.2,29.46
N$33  (via drill 0.5 pad 1.68, 0.5 pad 1.93)
  Top 0.813: R12.1 Q3.2
  other vias: 91.48,56.13 91.48,52.32
N$34  (via drill 0.5 pad 1.42, 0.5 pad 1.68)  (1 unrouted)
  Top 0.61: IC2.1 v90.85,21.21
  other vias: 91.48,44.7
N$35  (via drill 0.5 pad 1.42)  (1 unrouted)
  Top 0.61: v94.66,27.56 94.02,27.56 92.75,28.83 IC5.7 | IC2.4 v94.66,21.21
N$36  (via drill 0.5 pad 1.68)
  Top 0.61: 97.83,40.26 96.88,40.26 C4.1 | IC6.2 97.83,40.26 | 97.83,40.26 v98.47,40.26
N$37  (via drill 0.5 pad 1.68)
  Top 0.61: 92.75,40.26 91.8,40.26 C3.1 | IC5.2 92.75,40.26 | 92.75,40.26 v93.39,40.26
N$38  (via drill 0.5 pad 1.68)
  Top 0.61: 87.67,40.26 86.72,40.26 C2.1 | IC4.2 87.67,40.26 | 87.67,40.26 v88.31,40.26
N$39  (via drill 0.5 pad 1.68)
  Top 0.61: 82.59,40.26 81.64,40.26 C1.1 | IC3.2 82.59,40.26 | 82.59,40.26 v83.23,40.26
N$40  (via drill 0.5 pad 1.42, 0.5 pad 1.68)
  Top 0.813: C12.1 77.01,40.13 R18.3 78.78,38.35 R17.1
  other vias: 78.15,38.99 78.78,36.45
N$41
  Top 0.61: IC7.6 IC7.7
N$42  (via drill 0.5 pad 2.18)
  Top 1.27: v88.31,73.28 v85.77,73.28 v83.23,73.28
N$43  (via drill 0.5 pad 2.18)
  Top 1.27: v93.39,73.28 v95.93,73.28 v98.47,73.28
N$44  (via drill 0.5 pad 3.81)
  other vias: 124.02,67.39
N$45  (via drill 0.5 pad 3.81)
  other vias: 124.02,12.71
N$46  (via drill 0.5 pad 1.68, 0.5 pad 1.93)  (1 unrouted)
  other vias: 128.94,52.32 128.94,56.13
N$47  (via drill 0.5 pad 1.42, 0.5 pad 1.68)
  Bottom 0.61: v128.31,21.21 128.31,44.07 R28.2
  other vias: 128.94,44.7
N$48  (via drill 0.5 pad 1.42)
  Bottom 0.61: v132.12,21.21 v132.12,27.56
N$49  (via drill 0.5 pad 3.81)
  other vias: 4,12.71
N$51  (via drill 0.5 pad 1.42, 0.5 pad 1.68)
  Bottom 0.508: 130.22,38.35 131.48,38.35 133.39,40.26
  Bottom 0.61: v129.58,27.56 129.58,37.72 130.22,38.35 | 133.39,40.26 134.03,40.89 R29.2
  other vias: 134.03,44.7
N$52  (via drill 0.5 pad 1.68, 0.5 pad 1.93)  (1 unrouted)
  other vias: 134.03,56.13 134.03,52.32
N$53  (via drill 0.5 pad 1.68, 0.5 pad 1.93)  (1 unrouted)
  other vias: 144.19,56.13 144.19,52.32
N$54  (via drill 0.5 pad 1.42, 0.5 pad 1.68)
  Bottom 0.61: v139.74,27.56 139.74,37.72 140.38,38.35 141.64,38.35 144.19,40.89 R31.2
  other vias: 144.19,44.7
N$56  (via drill 0.5 pad 1.68, 0.5 pad 1.93)  (1 unrouted)
  other vias: 139.1,56.13 139.1,52.32
N$57  (via drill 0.5 pad 1.42, 0.5 pad 1.68)
  Bottom 0.61: v138.47,21.21 138.47,38.35 139.1,38.99 R34.2
  other vias: 139.1,44.7
N$58  (via drill 0.5 pad 1.42)
  Bottom 0.61: v142.28,21.21 v142.28,27.56 143.55,28.83 R33.1
N$59  (via drill 0.5 pad 1.68)
  other vias: 146.09,40.26
N$60  (via drill 0.5 pad 1.68)
  other vias: 141.01,40.26
N$61  (via drill 0.5 pad 1.68)
  other vias: 135.93,40.26
N$62  (via drill 0.5 pad 1.68)
  other vias: 130.85,40.26
N$63  (via drill 0.5 pad 1.42, 0.5 pad 1.68)  (1 unrouted)
  other vias: 125.77,38.99 126.41,36.45
N$65  (via drill 0.5 pad 2.18)  (2 unrouted)
  other vias: 135.93,73.28 133.39,73.28 130.85,73.28
N$66  (via drill 0.5 pad 2.18)  (2 unrouted)
  other vias: 143.55,73.28 141.01,73.28 146.09,73.28
S$1  (via drill 0.5 pad 2.18)
  Top 0.813: D10.A 99.73,70.74 100.37,71.37 100.37,76.45 | 90.85,76.45 81.96,76.45 81.32,75.82 81.32,71.37 81.96,70.74 D9.A
  Top 2.184: SV1.6 SV1.5 90.85,76.45
  Top 2.54: 102.91,76.45 100.37,76.45 90.85,76.45 82.59,76.45
  other vias: 98.47,70.74 83.23,70.74
S$2  (via drill 0.5 pad 2.18)
  Top 0.813: D405.A 27.34,70.74 27.98,71.37 27.98,76.45 | 18.45,76.45 9.57,76.45 8.93,75.82 8.93,71.37 9.57,70.74 D402.A
  Top 2.184: SV402.6 SV402.5 18.45,76.45
  Top 2.54: 30.52,76.45 27.98,76.45 18.45,76.45 10.2,76.45
  other vias: 26.07,70.74 10.84,70.74
S$3  (via drill 0.5 pad 1.93)  (3 unrouted)
  other vias: 93.39,2.16 95.93,2.16 88.31,2.16 85.77,2.16
S$4  (via drill 0.5 pad 2.18)  (3 unrouted)
  other vias: 146.09,70.74 130.85,70.74
S$5  (via drill 0.5 pad 1.93)
  Bottom 1.016: R45.1 R44.1 R43.1 R42.1
  Bottom 1.27: 151.17,2.16 R45.1 R42.1
  other vias: 141.01,2.16 143.55,2.16 135.93,2.16 133.39,2.16
S$6  (via drill 0.5 pad 1.42)
  Bottom 0.61: v146.09,21.21 v146.09,23.75
S$24  (via drill 0.5 pad 1.93)
  Bottom 1.016: R104.1 R103.1 R102.1 R101.1
  Bottom 1.27: 31.15,2.16 R104.1 R101.1
  other vias: 20.99,2.16 23.54,2.16 15.91,2.16 13.38,2.16
TR_CLK  (via drill 0.5 pad 2.54)
  Top 0.61: 12.11,22.48 IC301.11 | 10.84,22.48 IC301.3 | 12.11,22.48 20.99,22.48 | 20.99,22.48 22.27,22.48 | 22.27,22.48 IC302.11 | 20.99,22.48 IC302.3 | R201.2 4.87,22.48 10.84,22.48 | 22.27,22.48 31.15,22.48 | 10.84,22.48 12.11,22.48
  other vias: 4.36,22.99
TR_CLK1  (via drill 0.5 pad 2.54)
  Top 0.61: 84.5,22.48 IC1.11 | 83.23,22.48 IC1.3 | 84.5,22.48 93.39,22.48 | 93.39,22.48 94.66,22.48 | 94.66,22.48 IC2.11 | 93.39,22.48 IC2.3 | R19.2 77.26,22.48 83.23,22.48 | 94.66,22.48 103.55,22.48 | 83.23,22.48 84.5,22.48
  other vias: 76.75,22.99
TR_CLK2  (via drill 0.5 pad 2.54)
  other vias: 124.37,22.99
VCC
  Bottom 2.184: SV101.6 SV101.5 18.45,5.97 19.72,4.7
  Bottom 2.54: 19.72,4.7 30.52,4.7
VCC1  (1 unrouted)
VCC2
  Bottom 2.184: SV4.6 SV4.5 138.47,5.97 139.74,4.7
  Bottom 2.54: 139.74,4.7 150.53,4.7
~0.5V  (via drill 0.5 pad 1.68)
  Top 0.61: IC201.3 2.58,37.72 1.31,38.99 1.31,40.89 1.95,41.53 R203.2
  other vias: 5.75,41.53
~0.5V1  (via drill 0.5 pad 1.68)
  Top 0.61: IC7.3 74.97,37.72 73.7,38.99 73.7,40.89 74.34,41.53 R18.2
  other vias: 78.15,41.53
~0.5V2  (via drill 0.5 pad 1.68)
  other vias: 125.77,41.53

## Text on the board
tDocu: P_GND | P_GND | P_GND | +5V | +5V | +5V | TR_CLK | TR_CLK | TR_CLK | OC3C | PE5_INT5 | OC3C | PE5_INT5 | OC3C | PE5_INT5 | S_GND | S_GND | S_GND